# EAGLE board OPA_BOARD_V1 (EAGLE 7.5.0)
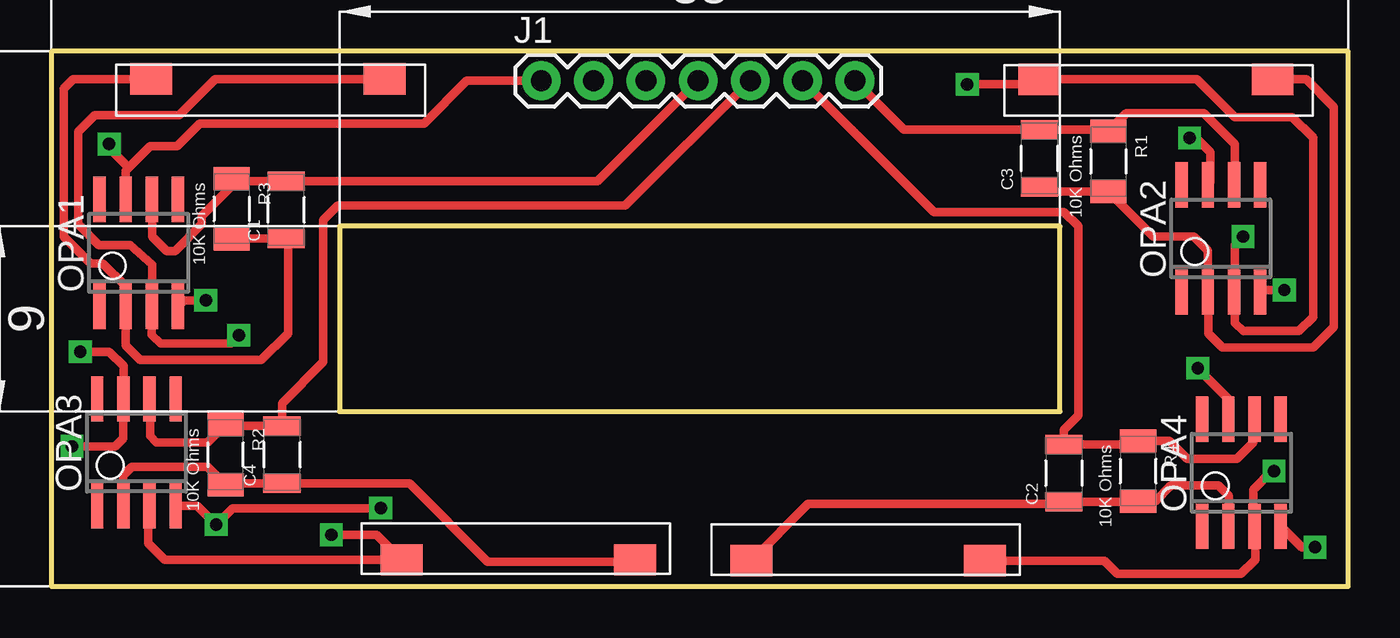
[diagram p0: board, top side]
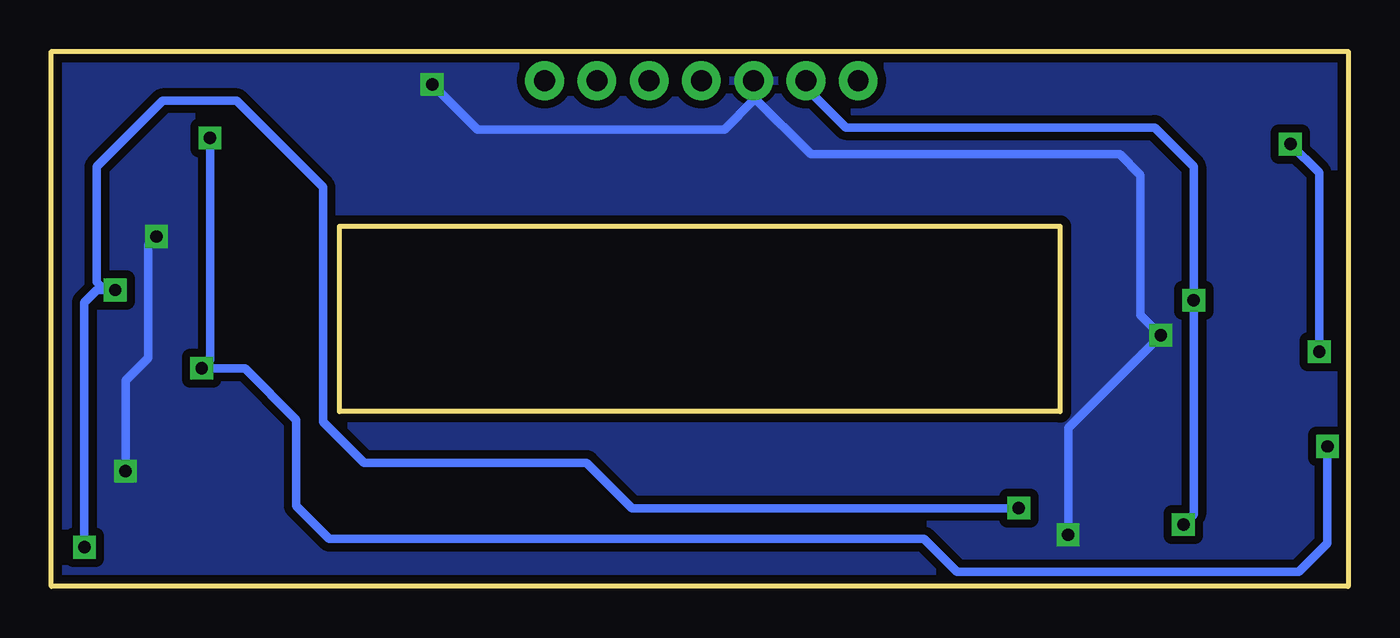
[diagram p1: board, bottom side, seen from below]

Size 63 x 26 mm. Coordinates in mm from the lower left corner, seen from the top.
Outline: 0,0 63,0 63,26 0,26 0,0
Outline: 14,8.5 49,8.5 49,17.5 14,17.5 14,8.5
Copper layers (1*16): Top 0.035mm / dielectric 1.5mm / Bottom 0.035mm
Design rules "SparkFun": minimum track width 8mil, minimum drill 20mil, track to track 8mil, track to pad 8mil, pad to pad 8mil, via to via 8mil, smd to smd 8mil, copper to edge 10mil, drill to drill 8mil, minimum pad ring 12mil, minimum via ring 10mil, stop-mask expansion 4mil, vias tented up to drill 25mil, thermal gap 10mil

## Footprints (pad centres in the part's own frame; a part is rotated, then mirrored left to right if it is on the bottom)
CAP1206 = smd 0.914 x 1.803: 1 -1.397,0; 2 1.397,0
1X07 = drill 1.016 pad 1.88: 1 0,0; 2 2.54,0; 3 5.08,0; 4 7.62,0; 5 10.16,0; 6 12.7,0; 7 15.24,0
SOIC8 = smd 0.6 x 2.2: 1 -1.905,-2.6; 2 -0.635,-2.6; 3 0.635,-2.6; 4 1.905,-2.6; 5 1.905,2.6; 6 0.635,2.6; 7 -0.635,2.6; 8 -1.905,2.6
RES1206 = smd 1.118 x 1.753: 1 -1.473,0; 2 1.473,0
PANELPADS = smd 2.032 x 1.524: P$1 1.956,0.69; P$2 13.3,0.69

## Placement (x,y rotation side)
C1  10nF  [CAP1206]  11.4,18.3 90 top
C2  10nF  [CAP1206]  49.2,5.5 90 top
C3  10nF  [CAP1206]  48,20.8 90 top
C4  10nF  [CAP1206]  11.2,6.4 90 top
J1  [1X07]  23.8,24.58 0 top
OPA1  [SOIC8]  4.24,16.21 0 top
OPA2  [SOIC8]  56.82,16.91 0 top
OPA3  [SOIC8]  4.13,6.51 0 top
OPA4  [SOIC8]  57.82,5.52 0 top
R1  10K Ohms  [RES1206]  51.36,20.65 270 top
R2  10K Ohms  [RES1206]  8.46,6.4 270 top
R3  10K Ohms  [RES1206]  8.76,18.35 270 top
R4  10K Ohms  [RES1206]  52.8,5.6 270 top
SP1  PANELPAD  [PANELPADS]  18.15,25.35 180 top
SP2  PANELPAD  [PANELPADS]  61.29,25.33 180 top
SP3  PANELPAD  [PANELPADS]  15.06,0.6 0 top
SP4  PANELPAD  [PANELPADS]  32.06,0.56 0 top

## Library data of the parts
C1-C4 = RSC-16; MPN: C1206C103K5RACTU; OC_FARNELL: 1414713; OC_NEWARK: 61H7741; SUPPLIER: Kemet; TOLERANCE: ±10%; VOLTAGERATING: 50V
J1 = SparkFun-Connectors
OPA1-OPA4 SP1-SP4 = RSC-16
R1-R4 = RSC-16; MPN: CRCW120610K0FKEA; OC_FARNELL: 1469970; OC_NEWARK: 53K1907; SUPPLIER: Vishay; TOLERANCE: ±1%; WATTAGE: 0.25W

## Nets
+12V: J1.1 OPA1.7 OPA2.7 OPA3.7 OPA4.7
-12V: J1.2 OPA1.4 OPA2.4 OPA3.4 OPA4.4
CH0: C1.2 J1.4 OPA1.6 R3.1
CH1: C4.2 J1.5 OPA3.6 R2.1
CH2: C2.2 J1.6 OPA4.6 R4.1
CH3: C3.2 J1.7 OPA2.6 R1.1
GND: J1.3 OPA1.3 OPA2.3 OPA3.3 OPA4.3 SP1.P$1 SP2.P$2 SP3.P$1 SP4.P$2
N$1: C1.1 OPA1.2 R3.2 SP1.P$2
N$4: C2.1 OPA4.2 R4.2 SP4.P$1
N$6: C4.1 OPA3.2 R2.2 SP3.P$2
N$9: C3.1 OPA2.2 R1.2 SP2.P$1

## Tracks (layer width: path | path; a pad name or v marks a point on that pad's centre or on a via)
+12V  (via drill 0.6)
  Top 0.406: J1.1 20.18,24.58 18.1,22.5 7.2,22.5 6.1,21.4 4.8,21.4 3.75,20.35 | 3.75,20.35 3.6,20.2 OPA1.7 | v2.8,21.5 2.8,21.3 3.75,20.35 | v1.4,11.4 2.8,11.4 3.5,10.7 OPA3.7 3.5,7.2 3.1,6.8 v1,6.8 | OPA4.7 57.19,9.12 v55.7,10.6 | v55.3,21.8 55.6,21.8 56.3,21.1 56.3,19.62 OPA2.7
  Bottom 0.406: v1.4,11.4 1.4,20.1 v2.8,21.5 | v1,6.8 1,2.1 2.4,0.7 19,0.7 20.6,2.3 49.5,2.3 51.1,3.9 51.1,8.1 53.6,10.6 v55.7,10.6 55.3,11 v55.3,21.8
-12V  (via drill 0.6)
  Top 0.406: v61.4,1.9 60.74,1.9 OPA4.4 | v59.9,14.4 58.81,14.4 OPA2.4 | v7.5,13.9 6.43,13.9 OPA1.4 | OPA3.4 7.09,3.91 v8,3 8.8,3.8 v16,3.8
  Bottom 0.406: v59.9,14.4 60.4,14.4 | 60.4,14.4 60.8,14.4 61.4,13.8 v61.4,1.9 | v8,3 7.5,3.5 v7.5,13.9 7.5,20.4 9.4,22.3 24.4,22.3 26.34,24.24 J1.2 | v16,3.8 34.8,3.8 37,6 47.8,6 49.8,8 49.8,19.4 54,23.6 57.6,23.6 60.8,20.4 60.8,14.8 60.4,14.4
CH0
  Top 0.406: 9.09,19.6 R3.1 | R3.1 8.89,19.7 C1.2 26.54,19.7 J1.4 | R3.1 8.76,19.46 7.3,18 7.3,17.6 6,16.3 5.6,16.3 4.9,17 4.9,18.79 OPA1.6
CH1
  Top 0.406: OPA3.6 4.8,9.07 4.8,7.3 5.1,7 7.59,7 R2.1 8.54,7.8 C4.2 11.2,8.9 13.2,10.9 13.2,17.8 13.9,18.5 27.88,18.5 J1.5
CH2
  Top 0.406: OPA4.6 58.4,8.06 58.4,7 57.6,6.2 55.2,6.2 54.33,7.07 R4.1 52.62,6.9 C2.2 49.2,7.6 49.9,8.3 49.9,17.5 49.2,18.2 42.88,18.2 J1.6
CH3
  Top 0.406: OPA2.6 57.5,19.55 57.5,21.5 56,23 52.24,23 R1.1 51.29,22.2 C3.2 41.42,22.2 J1.7
GND  (via drill 0.6)
  Top 0.406: SP4.P$2 51.15,1.25 51.8,0.6 57.8,0.6 58.5,1.3 58.5,2.88 OPA4.3 58.4,2.98 58.4,4.7 59.3,5.6 v59.4,5.6 | SP1.P$1 7.96,24.66 6.2,22.9 2.1,22.9 1.3,22.1 1.3,17.6 2.3,16.6 3.83,16.6 4.9,15.63 OPA1.3 4.88,12.22 5.3,11.8 8.7,11.8 v9.1,12.2 | OPA3.3 4.7,3.85 4.7,2.1 5.51,1.29 SP3.P$1 15.81,2.5 v13.6,2.5 | 57.5,14.27 57.5,12.8 57.9,12.4 60.6,12.4 61.3,13.1 61.3,21.8 60.3,22.8 57.5,22.8 55.66,24.64 SP2.P$2 47.75,24.4 v44.5,24.4 | 57.5,14.27 OPA2.3 | 57.5,14.27 57.5,16.6 v57.9,17
  Bottom 0.406: v13.6,2.5 13.6,7.7 v9.1,12.2 10.1,13.2 10.1,20 11.1,21 26.1,21 28.88,23.78 J1.3 28.88,23.62 30.3,22.2 42.3,22.2 v44.5,24.4 | v59.4,5.6 59.4,10 58.3,11.1 58.3,16.6 v57.9,17
  pour Bottom (isolate 0.406): 0,26 63,26 63,0 0,0
N$1
  Top 0.406: 8.99,16.8 R3.2 8.79,16.9 C1.1 11.5,16.8 11.5,12.3 10.2,11 4.3,11 3.6,11.7 OPA1.2 3.6,14.6 2.5,15.7 1.9,15.7 0.6,17 0.6,24.2 1.06,24.66 SP1.P$2
N$4
  Top 0.406: SP4.P$1 36.77,4 49.1,4 C2.1 52.78,4.1 R4.2 53.63,4.13 54.4,4.9 56.7,4.9 57.2,4.4 57.2,2.94 OPA4.2
N$6
  Top 0.406: OPA3.2 3.5,5.39 3.9,5.8 7.59,5.8 R2.2 8.54,5 C4.1 17.4,5 21.2,1.2 28.27,1.2 SP3.P$2
N$9
  Top 0.406: SP2.P$1 60.96,24.64 62.3,23.3 62.3,12.6 61.3,11.6 56.9,11.6 56.2,12.3 56.2,14.29 OPA2.2 56.19,16.32 55.5,17 53.54,17 R1.2 48.23,19.18 C3.1

## Text on the board
tPlace: From center of slot to header pin holes | From bottom of board to header pin holes at top